# EAGLE board relay_switch_fet (EAGLE 9.1.3)
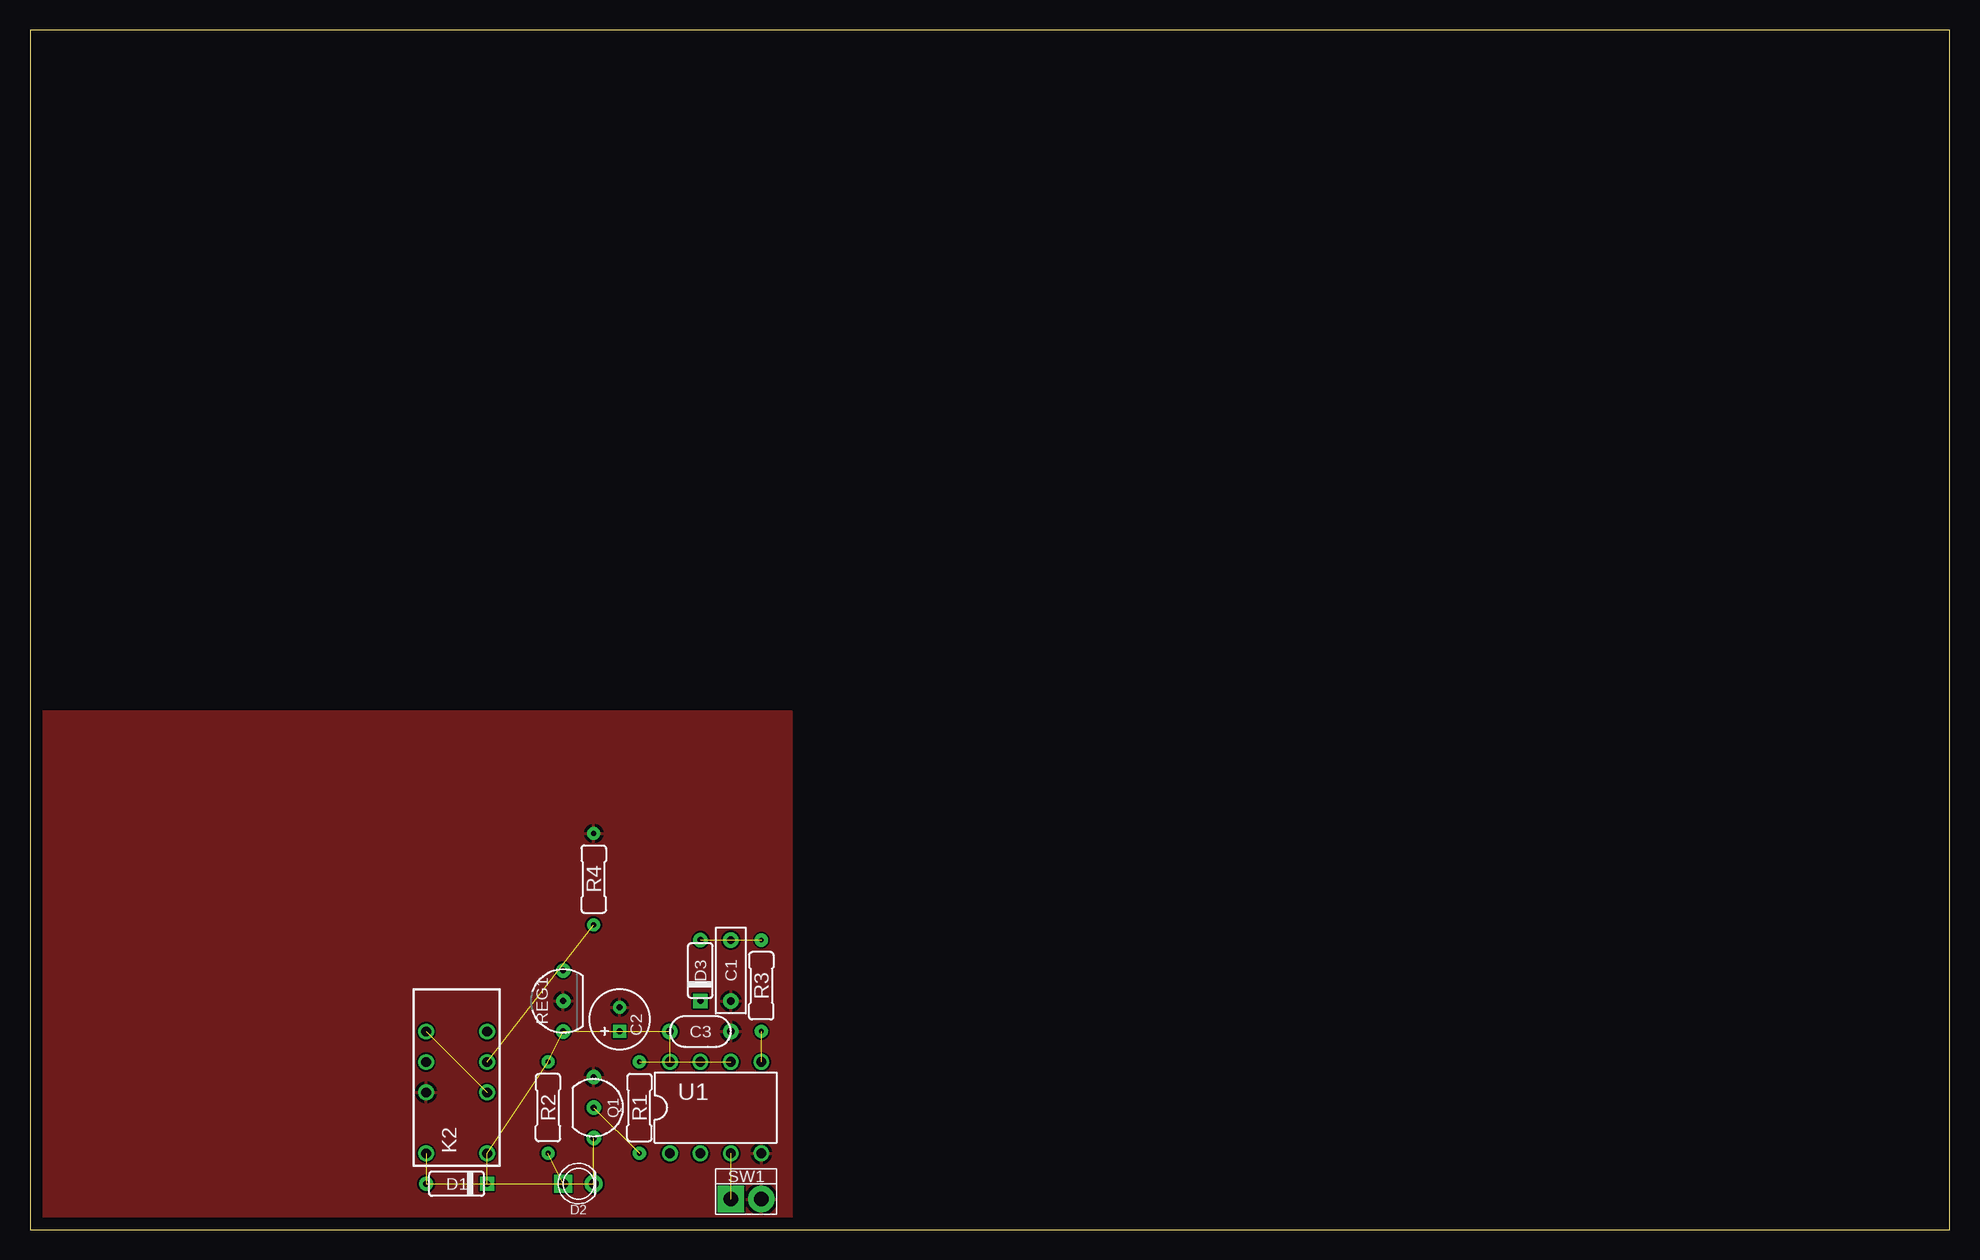
[diagram p0: board, top side]
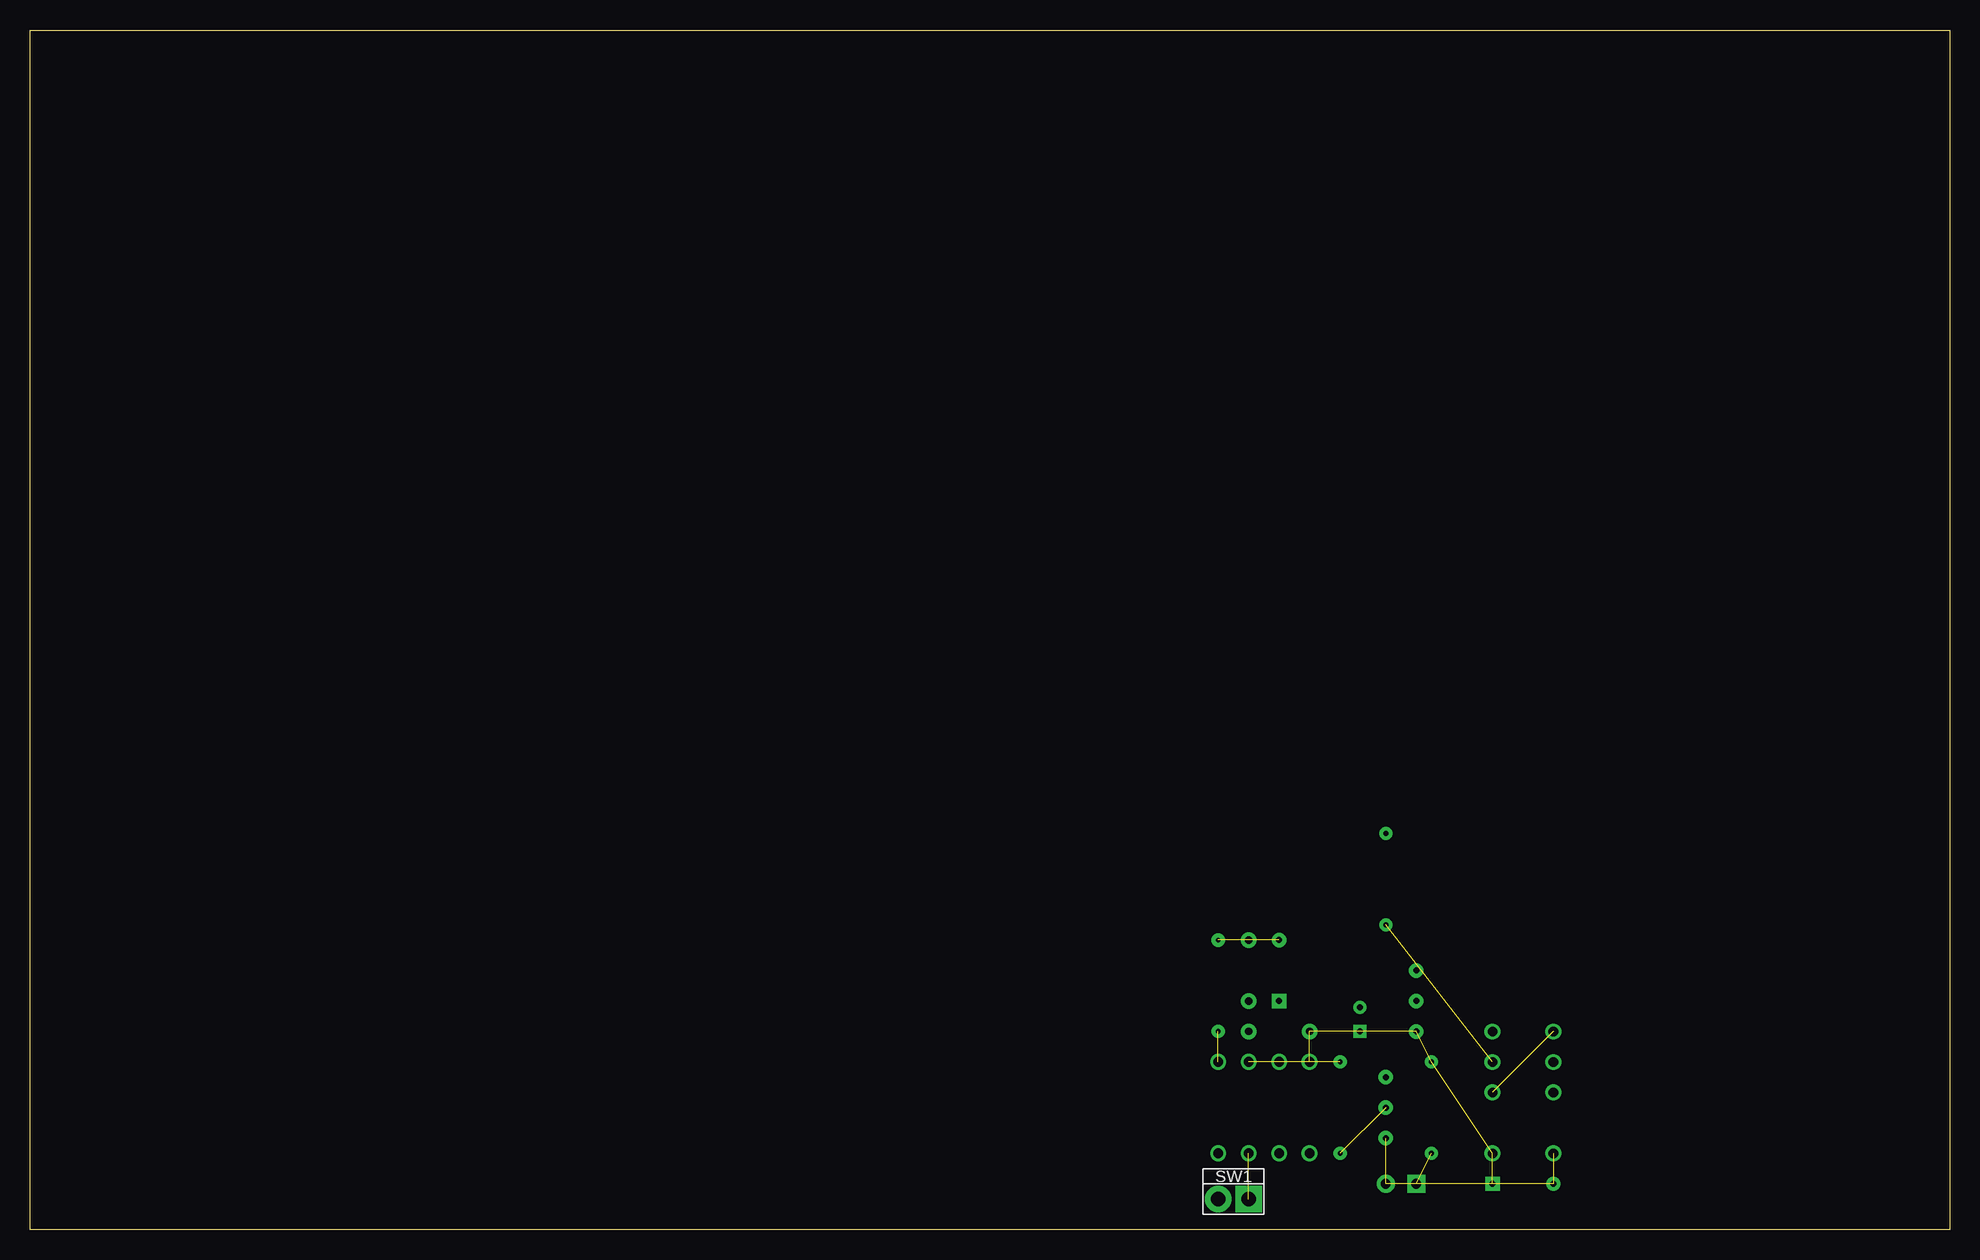
[diagram p1: board, bottom side, seen from below]

Size 160 x 100 mm. Coordinates in mm from the lower left corner, seen from the top.
Outline: 0,0 160,0 160,100 0,100 0,0
Copper layers (1*16): Top 0.035mm / dielectric 1.5mm / Bottom 0.035mm
Design rules "default": minimum track width 6mil, minimum drill 0.35mm, track to track 6mil, track to pad 6mil, pad to pad 6mil, via to via 6mil, smd to smd 6mil, copper to edge 40mil, drill to drill 6mil, minimum pad ring 10mil, minimum via ring 8mil, stop-mask expansion 4mil, vias tented up to drill 0mil, thermal gap 10mil

## Footprints (pad centres in the part's own frame; a part is rotated, then mirrored left to right if it is on the bottom)
BOX_SMALL = drill 0.6 pad 1.3: 1 -2.54,0; 2 2.54,0
050_020 = drill 0.5 pad 1.1 square: + -0.998,0.001 | drill 0.5 pad 1.1: - 0.998,0.001
050X030_025_2 = drill 0.6 pad 1.3: 1 -2.54,0; 2 2.54,0
DO35-2 = drill 0.5 pad 1.2: A 2.54,0 | drill 0.5 pad 1.2 square: C -2.54,0
3MM_D = drill 0.8 pad 1.5 square: ANODE -1.27,0 | drill 0.8 pad 1.5: P$1 1.27,0
NA = drill 0.8: 1 -6.35,-2.54; 3 -1.27,-2.54; 4 1.27,-2.54; 5 3.81,-2.54; 8 3.81,2.54; 9 1.27,2.54; 10 -1.27,2.54; 12 -6.35,2.54
TO92- = drill 0.5 pad 1.2: 1 2.54,0; 2 0,0; 3 -2.54,0
R0207/3 = drill 0.4 pad 1.1: 1 -3.81,0; 2 3.81,0
TO92-' = drill 0.5 pad 1.194: 1 -2.54,0; 2 0,0; 3 2.54,0
SPST = drill 1.2 pad 2.184 square: 1 -1.27,0 | drill 1.2 pad 2.184: 2 1.27,0
PDIP08_300MIL = drill 0.813: 1 -3.81,-3.81; 2 -1.27,-3.81; 3 1.27,-3.81; 4 3.81,-3.81; 5 3.81,3.81; 6 1.27,3.81; 7 -1.27,3.81; 8 -3.81,3.81

## Placement (x,y rotation side)
C1  100n  [BOX_SMALL]  58.42,21.59 270 top
C2  10u  [050_020]  49.15,17.53 90 top
C3  100n  [050X030_025_2]  55.88,16.51 0 top
D1  1N4148  [DO35-2]  35.56,3.81 180 top
D2  LED  [3MM_D]  45.72,3.81 0 top
D3  1N4148  [DO35-2]  55.88,21.59 90 top
K2  NA  [NA]  35.56,12.7 90 top
Q1  2N3904  [TO92-]  46.99,10.16 270 top
R1  22k  [R0207/3]  50.8,10.16 270 top
R2  1k  [R0207/3]  43.18,10.16 90 top
R3  100k  [R0207/3]  60.96,20.32 90 top
R4  100k  [R0207/3]  46.99,29.21 270 top
REG1  LM78L05  [TO92-']  44.45,19.05 270 top
SW1  MOMENTARY  [SPST]  59.69,2.54 0 top
U1  ATTINY85-20P  [PDIP08_300MIL]  57.15,10.16 0 top

## Library data of the parts
C1 C3 = pedals-capacitors-film
C2 = pedals-capacitors-elec
D1-D3 = pedals-diodes
K2 = pedals-relays; OC_FARNELL: unknown; OC_NEWARK: unknown
Q1 = pedals-transistors
R1-R4 = pedals-resistors
REG1 = pedals-regulators
SW1 = pedals-switches
U1 = pedals-microcontrollers

## Nets
+5V: C2.+ C3.1 D1.C K2.1 R2.2 REG1.3 U1.8
+9V: REG1.1
GND: C1.2 C2.- C3.2 K2.10 Q1.3 R4.1 REG1.2 SW1.2 U1.4
IN: K2.3 K2.8
N$2: D1.A D2.P$1 K2.12 Q1.1
N$3: Q1.2 R1.2
N$4: D2.ANODE R2.1
N$5: D3.C
N$6: C1.1 D3.A R3.2
OUT: K2.4 R4.2
PB0: R3.1 U1.5
PB1: R1.1 U1.6
PB2: U1.7
PB3: U1.2
PB4: SW1.1 U1.3
PB5: U1.1
RETURN: K2.5
SEND: K2.9

## Tracks (layer width: path | path; a pad name or v marks a point on that pad's centre or on a via)
+5V  (6 unrouted)
GND
  pour Top: 0,43.18 0,0 63.5,0 63.5,43.18
IN  (1 unrouted)
N$2  (3 unrouted)
N$3  (1 unrouted)
N$4  (1 unrouted)
N$6  (2 unrouted)
OUT  (1 unrouted)
PB0  (1 unrouted)
PB1  (1 unrouted)
PB4  (1 unrouted)